# Altium PCB e3_ej5_placa.PcbDoc
Units mm, origin at the board's own origin, x right, y up, seen from the top; angles counter-clockwise.
Board outline 50.04 x 50.04 mm, 2 copper layers (Top Layer, Bottom Layer); 9 components, 9 nets, 44 pads, 0 vias.
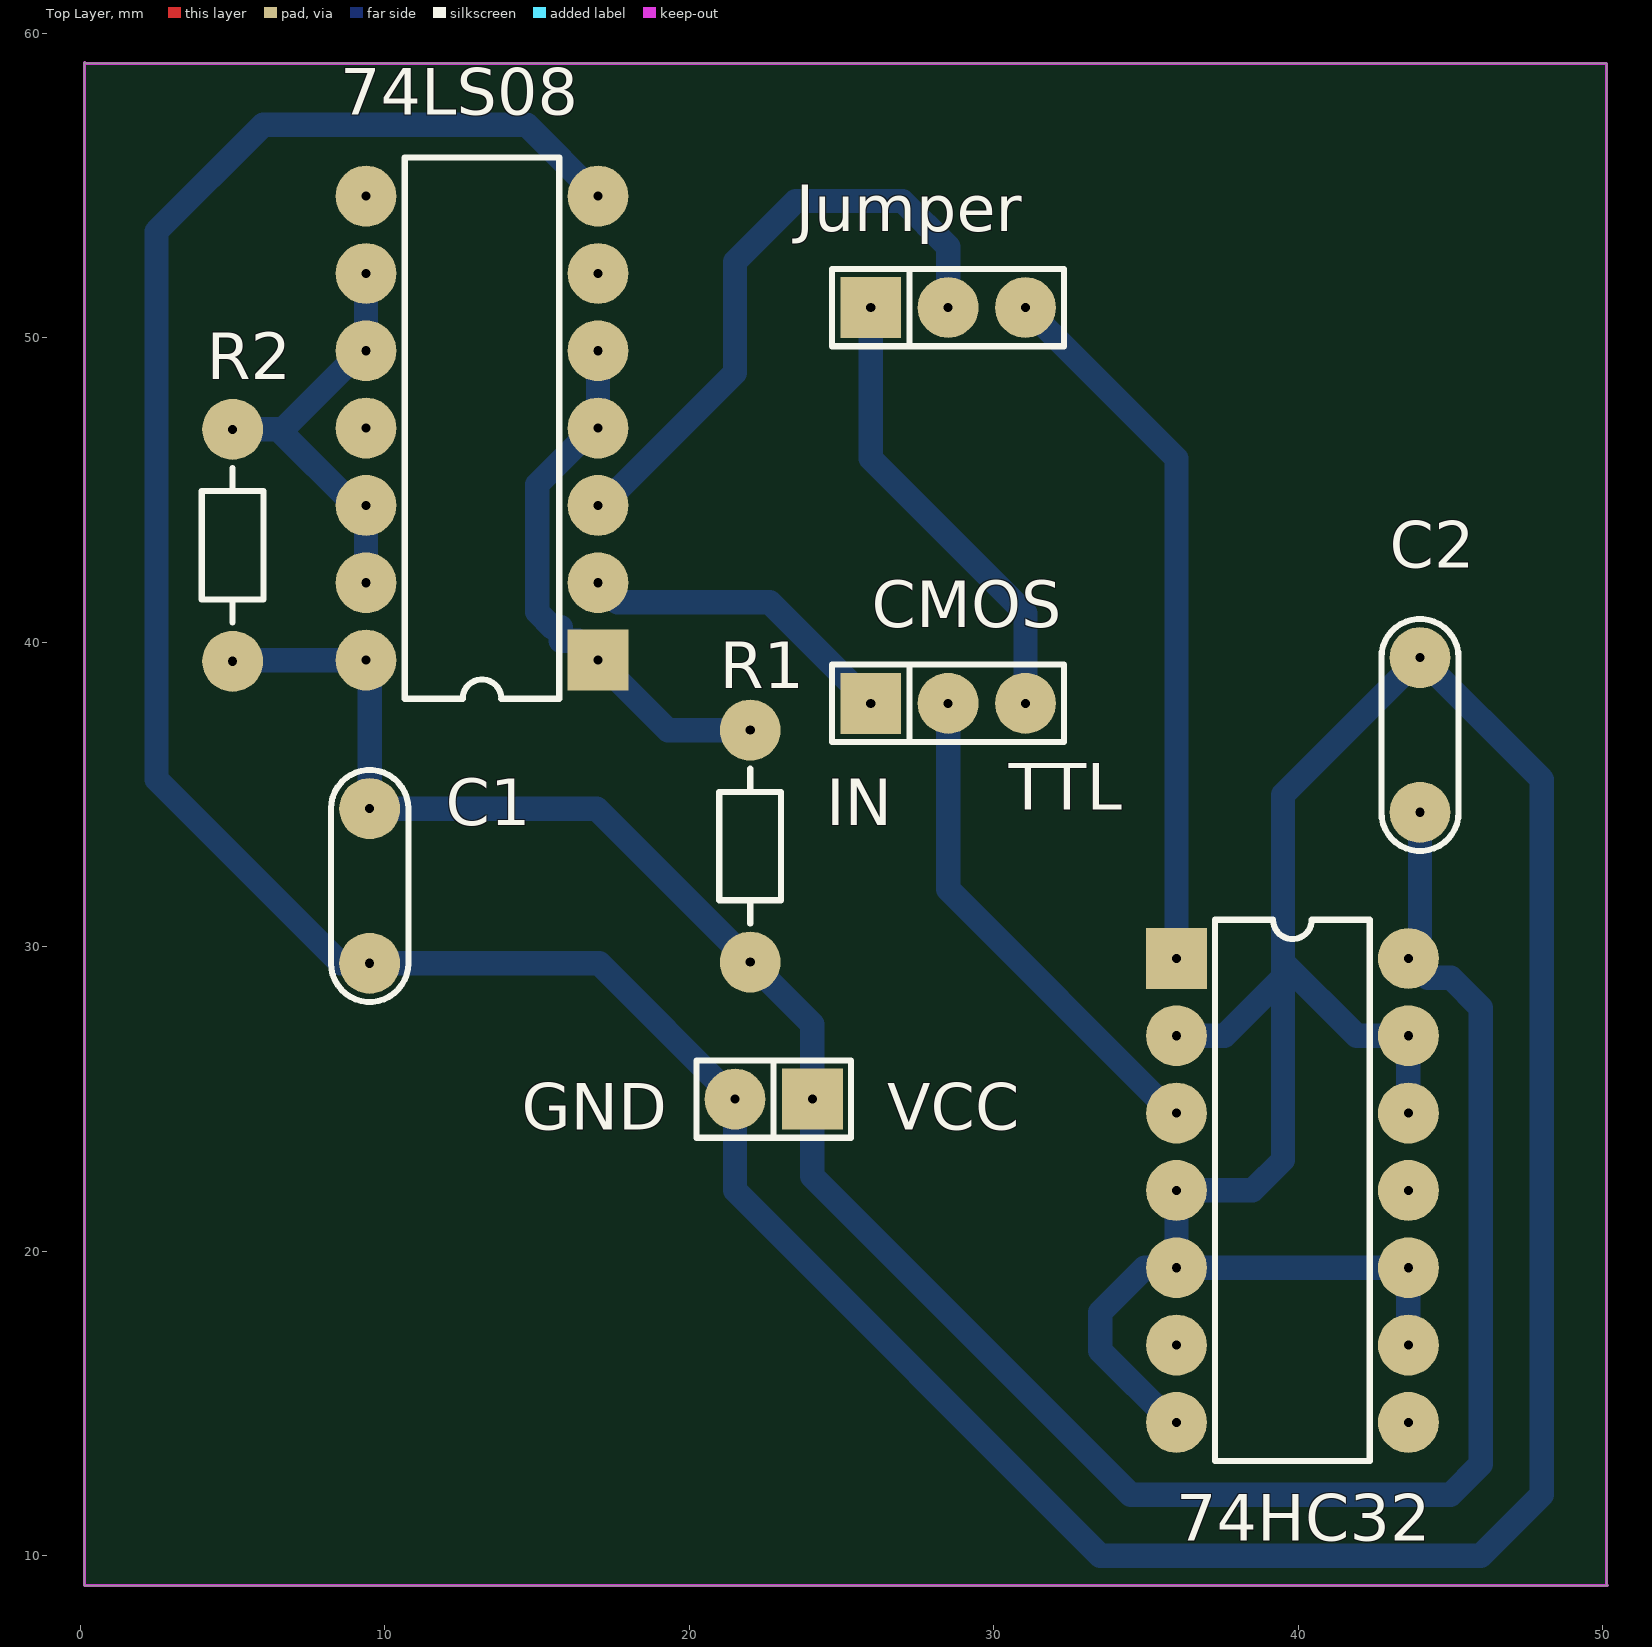
[diagram p0: Top Layer view]
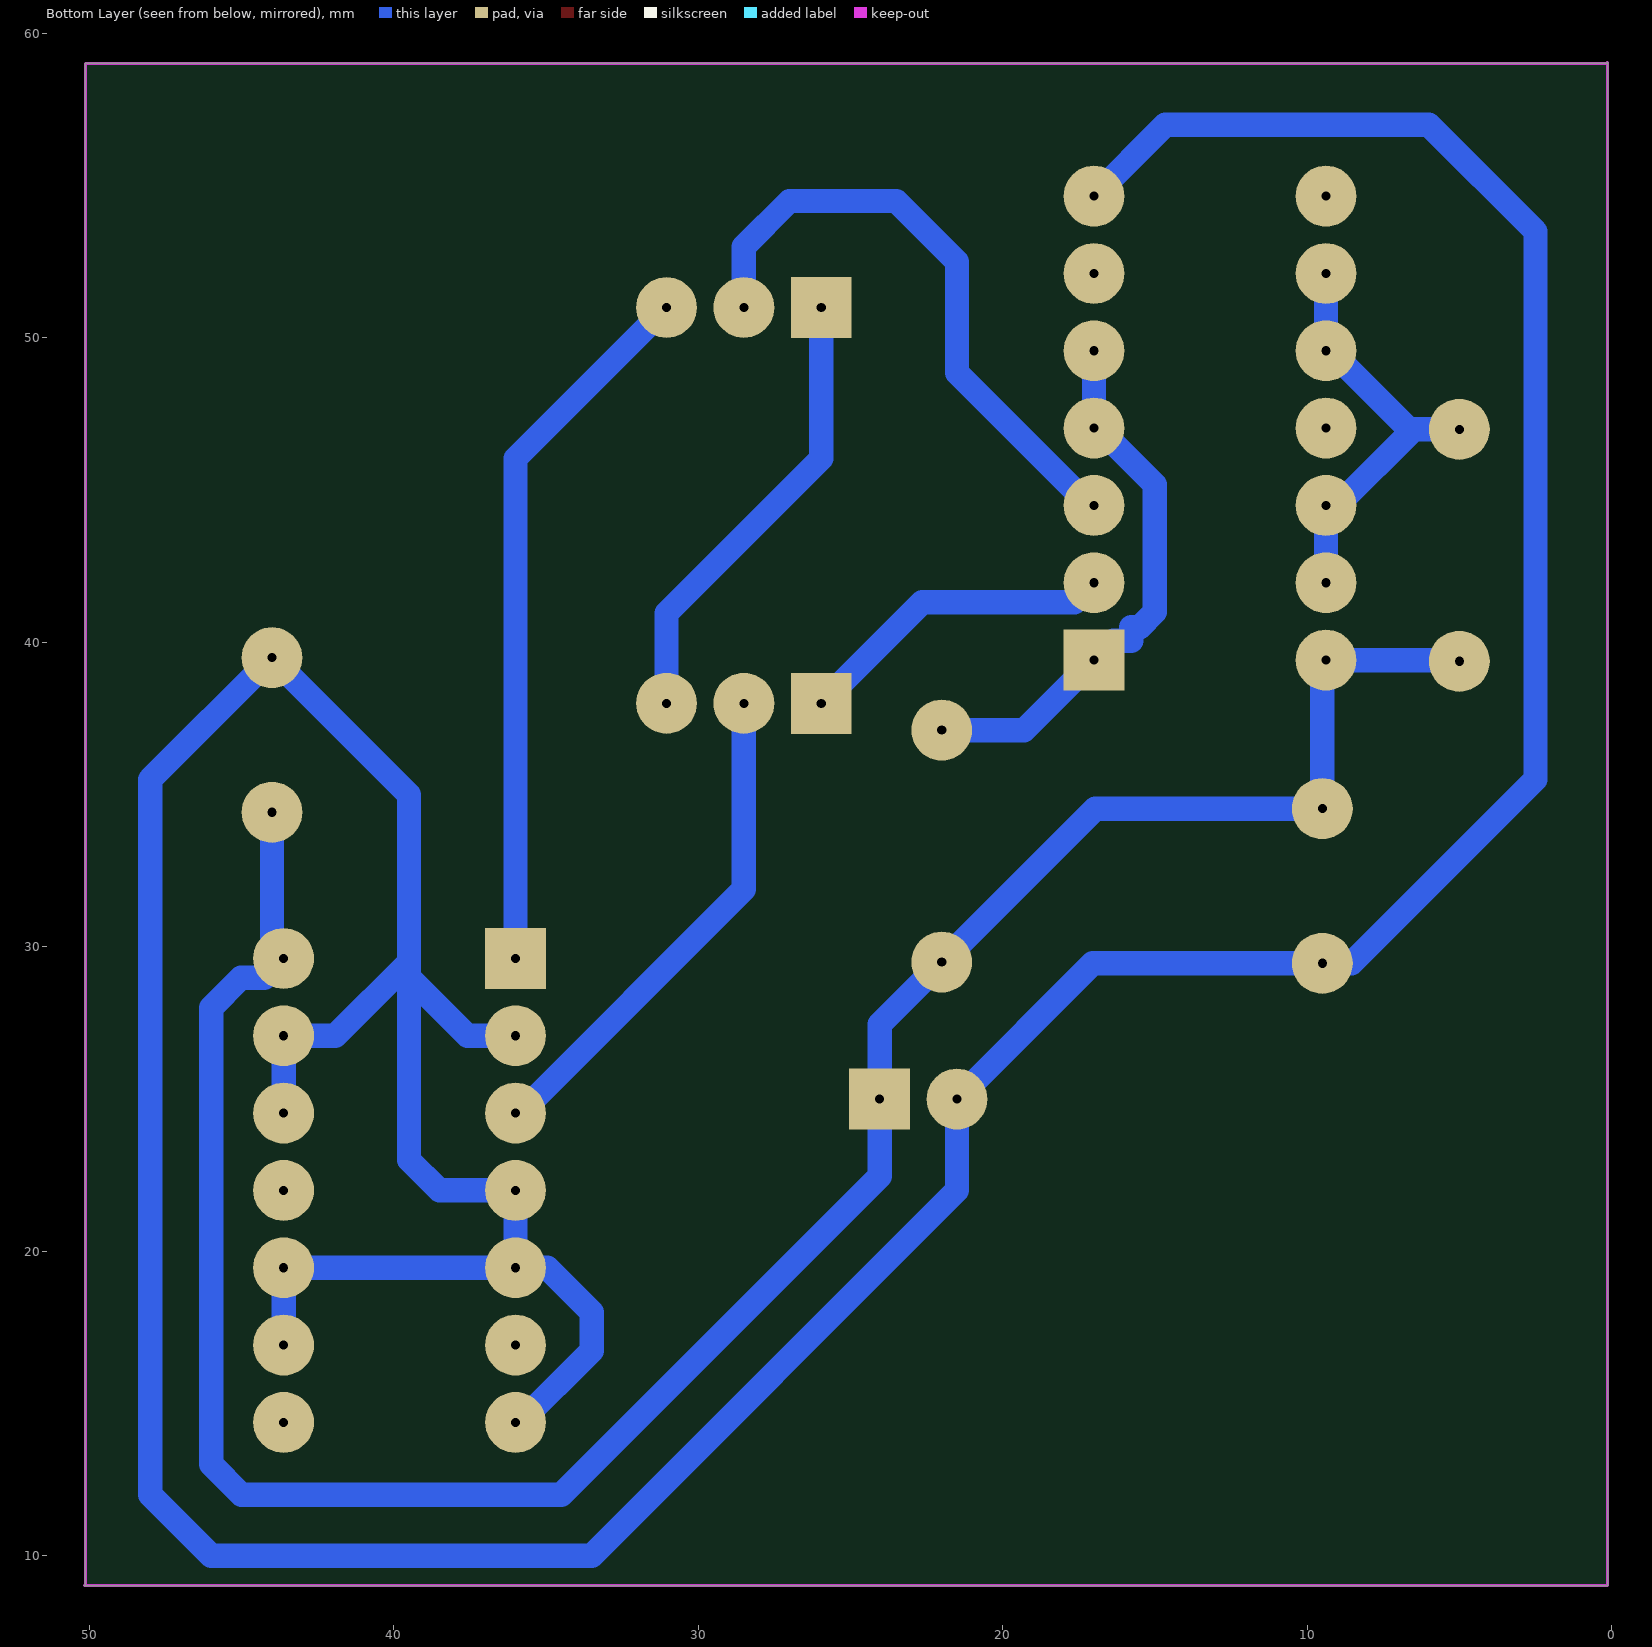
[diagram p1: Bottom Layer view, seen from below]
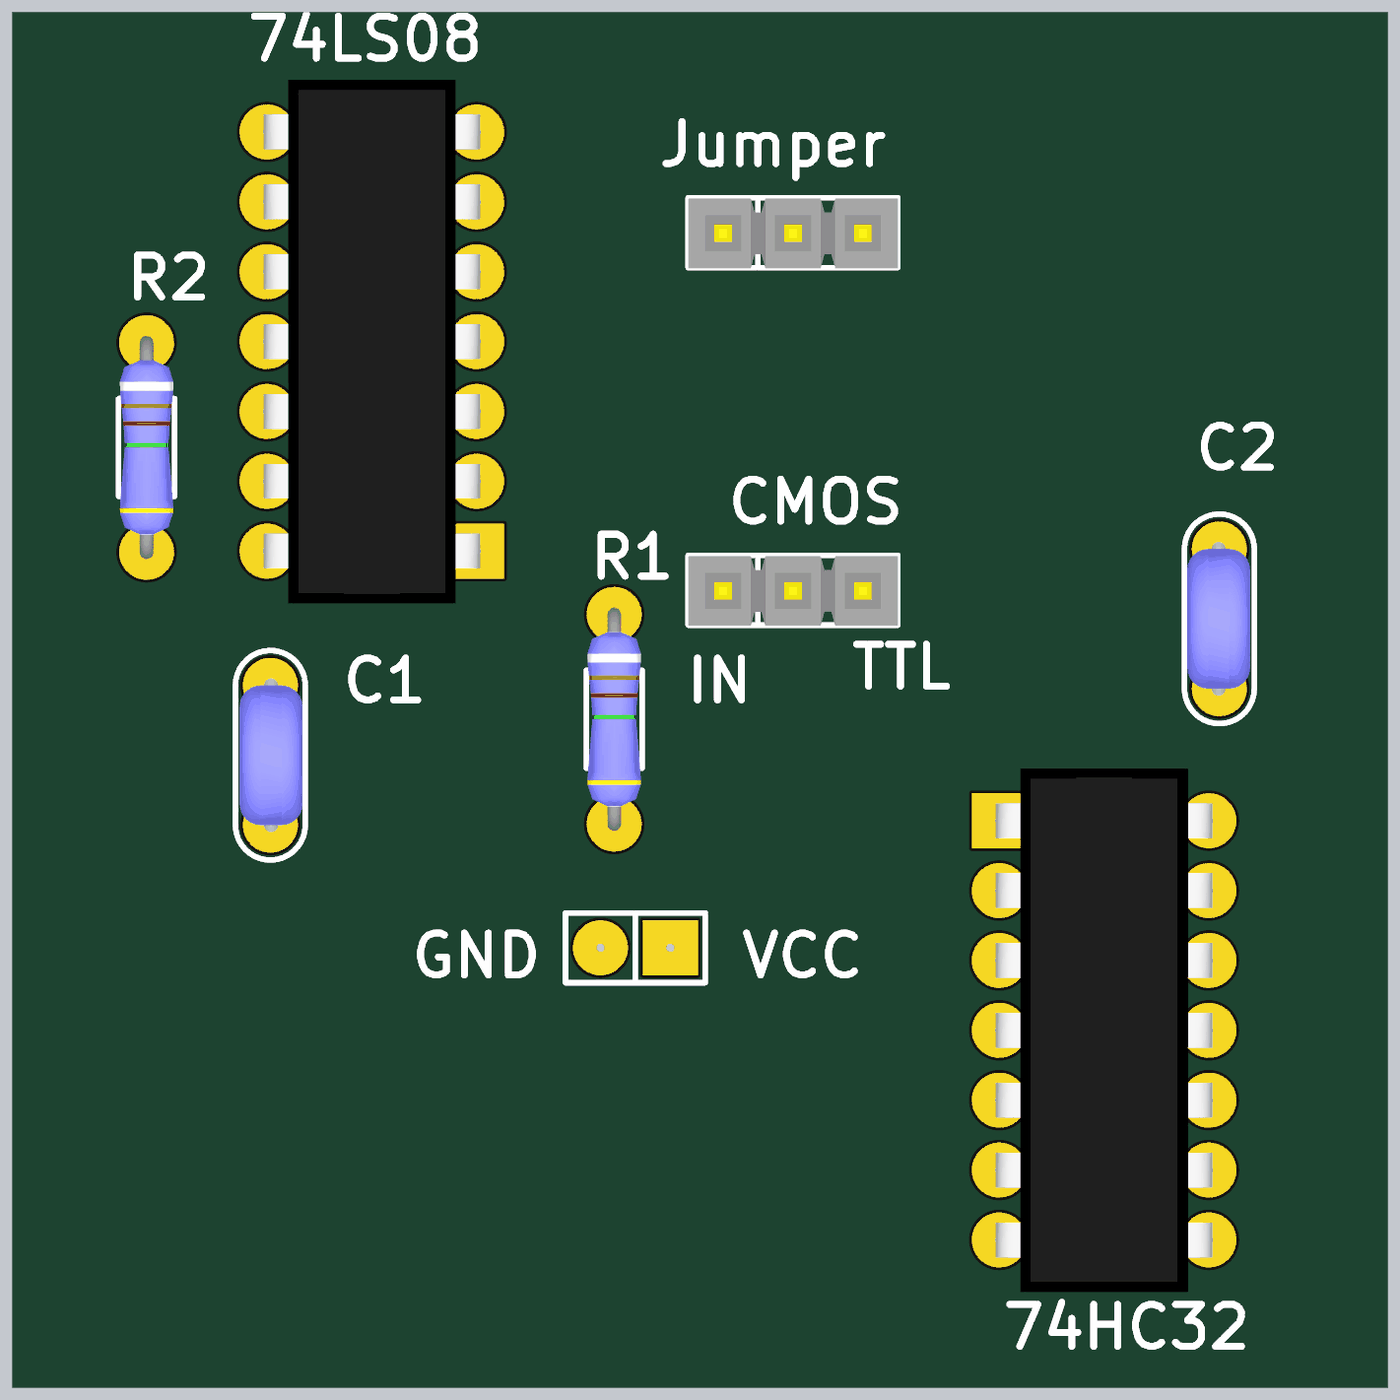
[diagram p2: 3D render of the assembled board from above, using the file's embedded part models]

## Layer stack, top to bottom
Top Solder: solder mask 0.0102, Solder Resist, Dk 3.5
Top Layer: signal copper 0.0356
Dielectric 1: dielectric 0.32, FR-4, Dk 4.8
Bottom Layer: signal copper 0.0356
Bottom Solder: solder mask 0.0102, Solder Resist, Dk 3.5

## Board outline
0.127,59.055 0.165,59.017 50.127,59.017 50.127,9.055 50.165,9.017 0.127,9.017

## Design rules (kind name [scope] priority, off if disabled: settings)
Clearance [All] p1: gap=0.5 ignorepadtopadclearanceinfootprint=FALSE
PolygonConnect [All] p1: connectstyle=Relief reliefconductorwidth=0.254 reliefentries=4 polygonreliefangle="90 Angle" airgapwidth=0.254
RoutingVias [All] p1: holewidth=2 width=0.5 viastyle="Through Hole" minholewidth=2 minwidth=0.5 maxholewidth=2 maxwidth=0.5
SolderMaskExpansion [All] p1: expansion=0.102
Width [All] p1: maxlimit=0.8 minlimit=0.8 preferedwidth=0.8
30 further rules are at their usual default settings.

## Components (designator, comment, footprint, x,y, rotation, side; value= is the part's Value field where it differs from the comment)
74HC32 "IC_DIP14" DIP14 36,29.62 r0 top
74LS08 "IC_DIP14" DIP14 17,39.42 r180 top
C1 "CAP" CAP200 9.5,32 r90 top
C2 "CAP" CAP200 44,36.96 r270 top
CMOS "CON3" SIP3 28.5,38 r0 top (schematic designator inout)
GND "CON2" SIP2 22.77,25 r180 top (schematic designator alimentacion)
Jumper "CON3" SIP3 28.5,51 r0 top
R1 "RES" RES300 22,37.12 r270 top
R2 "RES" RES300 5,47 r270 top

## Footprints (in the part's own frame and the unit in brackets; to place one, negate y for a bottom-side part, rotate by r counter-clockwise, add the part's x,y. Pads: shape width x height; smd on the part's side, far side on the other; paste and mask are expansions set on the pad)
CAP200 [mm]
  round 2 hole 0.3: 1(-2.54,0) 2(2.54,0)
  silkscreen extent -3.81,-1.27 3.81,1.27, body extent -2.79,-1.17 2.79,1.12, height 6.24
DIP14 [mm]
  rect 2x2 hole 0.3: 1(0,0)
  round 2 hole 0.3: 2(0,-2.54) 3(0,-5.08) 4(0,-7.62) 5(0,-10.16) 6(0,-12.7) 7(0,-15.24) 8(7.62,-15.24) 9(7.62,-12.7) 10(7.62,-10.16) 11(7.62,-7.62) 12(7.62,-5.08) 13(7.62,-2.54) 14(7.62,0)
  silkscreen extent 1.27,-16.51 6.35,1.27, body extent -0.13,-17.14 7.75,1.9, height 4.19
RES300 [mm]
  round 2 hole 0.3: 1(0,0) 2(7.62,0)
  silkscreen extent 1.27,-1.02 6.35,1.02, body extent -0.25,-0.97 7.87,0.97, height 2.01
SIP2 [mm]
  rect 2x2 hole 0.3: 1(-1.27,0)
  round 2 hole 0.3: 2(1.27,0)
  silkscreen extent -2.54,-1.27 2.54,1.27
SIP3 [mm]
  rect 2x2 hole 0.3: 1(-2.54,0)
  round 2 hole 0.3: 2(0,0) 3(2.54,0)
  silkscreen extent -3.81,-1.27 3.81,1.27, body extent -3.81,-1.3 3.81,1.24, height 8.38

## Nets (pads, with @x,y where several pads share a name; then routed paths per layer and width w, separated by ;. In a path a pad name is that pad's centre, name@x,y a point inside that pad or via, vN(x,y) a via of type N, cw(c..) or ccw(c..) an arc to the next point about the centre after c; other vN are vias at no path point)
GND: 74HC32.2 74HC32.4 74HC32.5 74HC32.7 74HC32.9 74HC32.10 74HC32.12 74HC32.13 74LS08.7 C1.1 C2.1 GND.2 | length 177.5
  Bottom Layer w0.8: 74LS08.7 14.66,57 6,57 2.5,53.5 2.5,35.5 8.54,29.46 C1.1 17.04,29.46 GND.2 21.5,22 33.5,10 46,10 48,12 48,35.5 C2.1 39.5,35 39.5,29.5 ; 74HC32.7 35.853,14.38 33.5,16.733 33.5,18 34.96,19.46 74HC32.5 ; 74HC32.2 37.58,27.08 39.5,29 ; 74HC32.9 74HC32.10 74HC32.5 ; 74HC32.12 74HC32.13 41.92,27.08 39.5,29.5 ; 74HC32.5 74HC32.4 38.5,22 39.5,23 39.5,29 ; 39.5,29 39.5,29.5
IN: 74LS08.2 CMOS.1 | length 10.6
  Bottom Layer w0.8: 74LS08.2 17.64,41.32 22.64,41.32 CMOS.1
Net74HC32_1: 74HC32.1 Jumper.3 | length 23.4
  Bottom Layer w0.8: Jumper.3 36,46.04 74HC32.1
Net74LS08_1: 74LS08.1 74LS08.4 74LS08.5 R1.1 | length 18.4
  Bottom Layer w0.8: 74LS08.5 74LS08.4 16.853,47.04 15,45.187 15,41 15.5,40.5 15.773,40.5 15.773,40.06 16.36,40.06 74LS08.1 19.3,37.12 R1.1
Net74LS08_3: 74LS08.3 Jumper.2 | length 20.4
  Bottom Layer w0.8: 74LS08.3 17.147,44.5 21.5,48.853 21.5,52.5 23.5,54.5 27,54.5 28.5,53 Jumper.2
Net74LS08_9: 74LS08.9 74LS08.10 74LS08.12 74LS08.13 R2.1 | length 14.4
  Bottom Layer w0.8: R2.1 6.5,47 ; 74LS08.13 74LS08.12 9,44.5 6.5,47 ; 74LS08.9 74LS08.10 9.233,49.58 6.653,47 6.5,47
OUT_CMOS: 74HC32.3 CMOS.2 | length 16.7
  Bottom Layer w0.8: CMOS.2 28.5,31.893 35.853,24.54 74HC32.3
OUT_TTL: CMOS.3 Jumper.1 | length 15.1
  Bottom Layer w0.8: Jumper.1 25.96,46.04 31.04,40.96 CMOS.3
VCC5: 74HC32.14 74LS08.14 C1.2 C2.2 GND.1 R1.2 R2.2 | length 81.5
  Bottom Layer w0.8: R2.2 5.04,39.42 74LS08.14 9.5,39.3 C1.2 16.96,34.54 R1.2 24.04,27.46 GND.1 24.04,22.46 34.5,12 45,12 46,13 46,28 45.02,28.98 44.26,28.98 74HC32.14 44,30 C2.2
pads on no net: 74HC32.6 74HC32.8 74HC32.11 74LS08.6 74LS08.8 74LS08.11

## Keep-outs
Keep-Out Layer:
  the board outline again, w0.1

## Silkscreen, mask and mechanical layers (free items; w line width, h text height)
Top Overlay:
  text "TTL" at 30.5,34.5 h1.52
  text "IN" at 24.5,34 h1.52
  text "VCC" at 26.5,24 h1.52